# Altium PCB PortSwitcher1D.PCBDOC (part 1 of 4)
Units mil, origin at the board's own origin, x right, y up, seen from the top; angles counter-clockwise.
Board outline 6005.03 x 6005.03 mil, 4 copper layers (Top Layer, InternalPlane1, InternalPlane2, Bottom Layer); 153 components, 325 nets, 1175 pads, 173 vias.
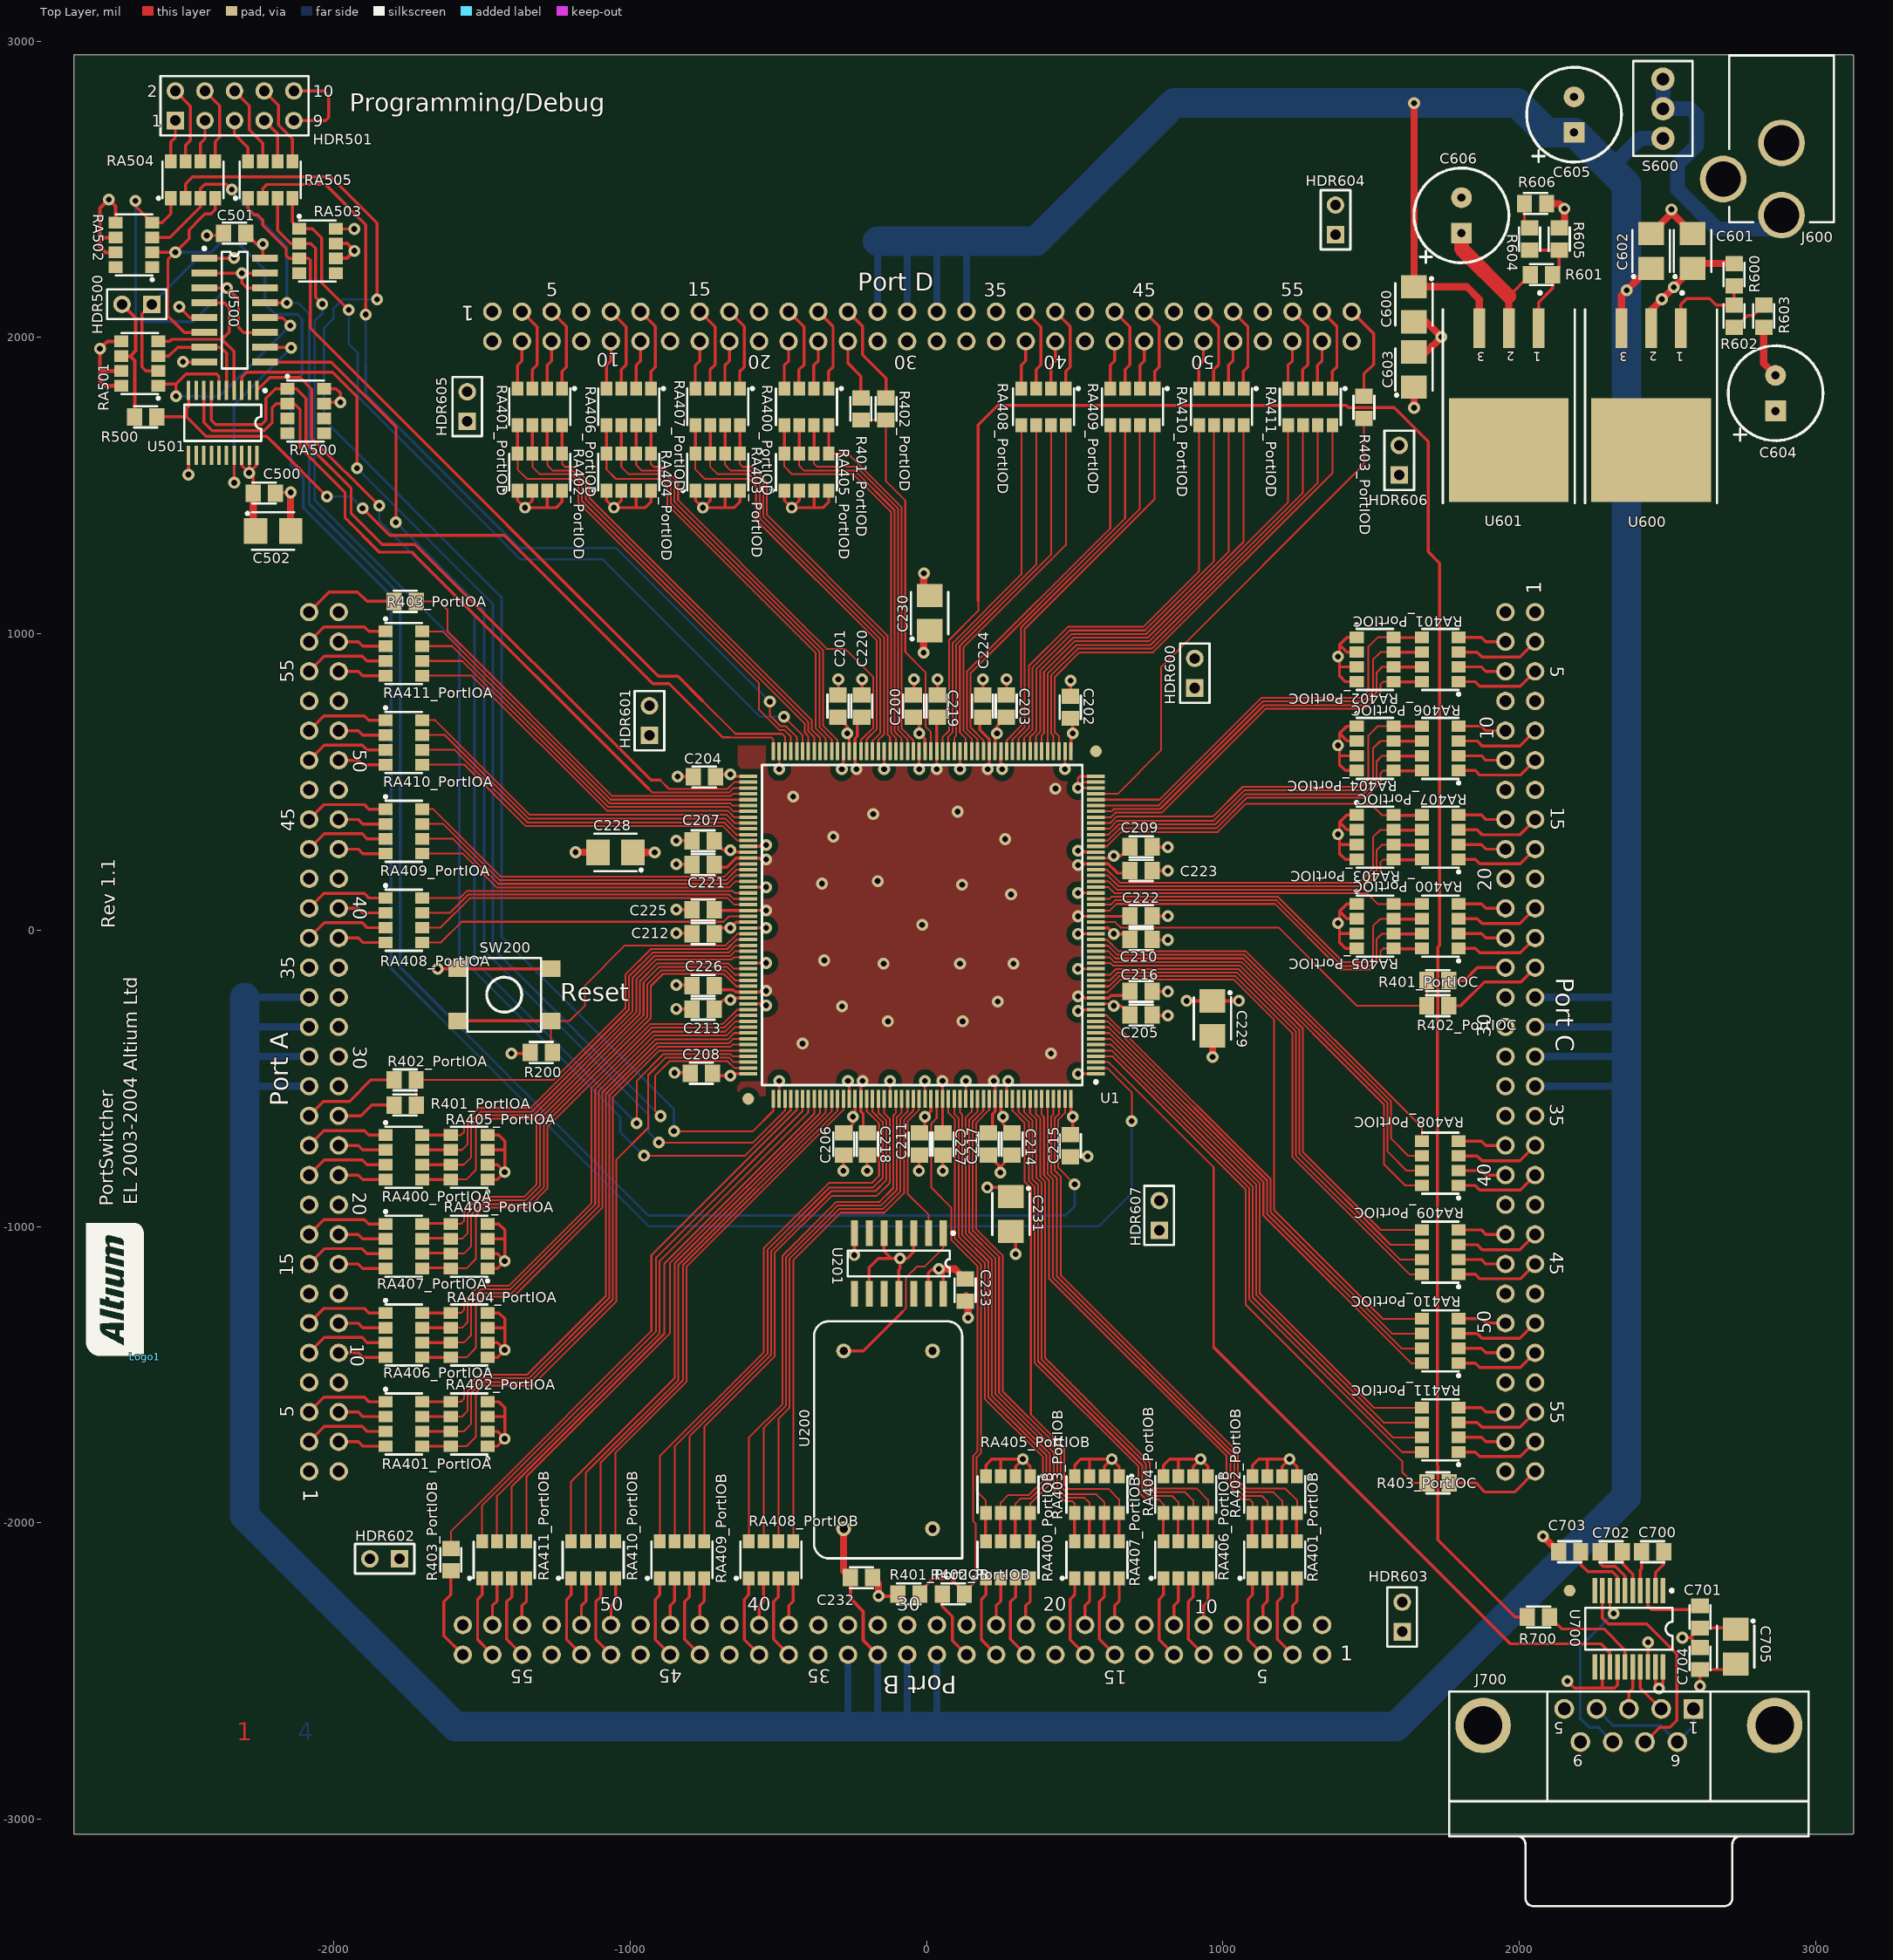
[diagram p0: Top Layer view]
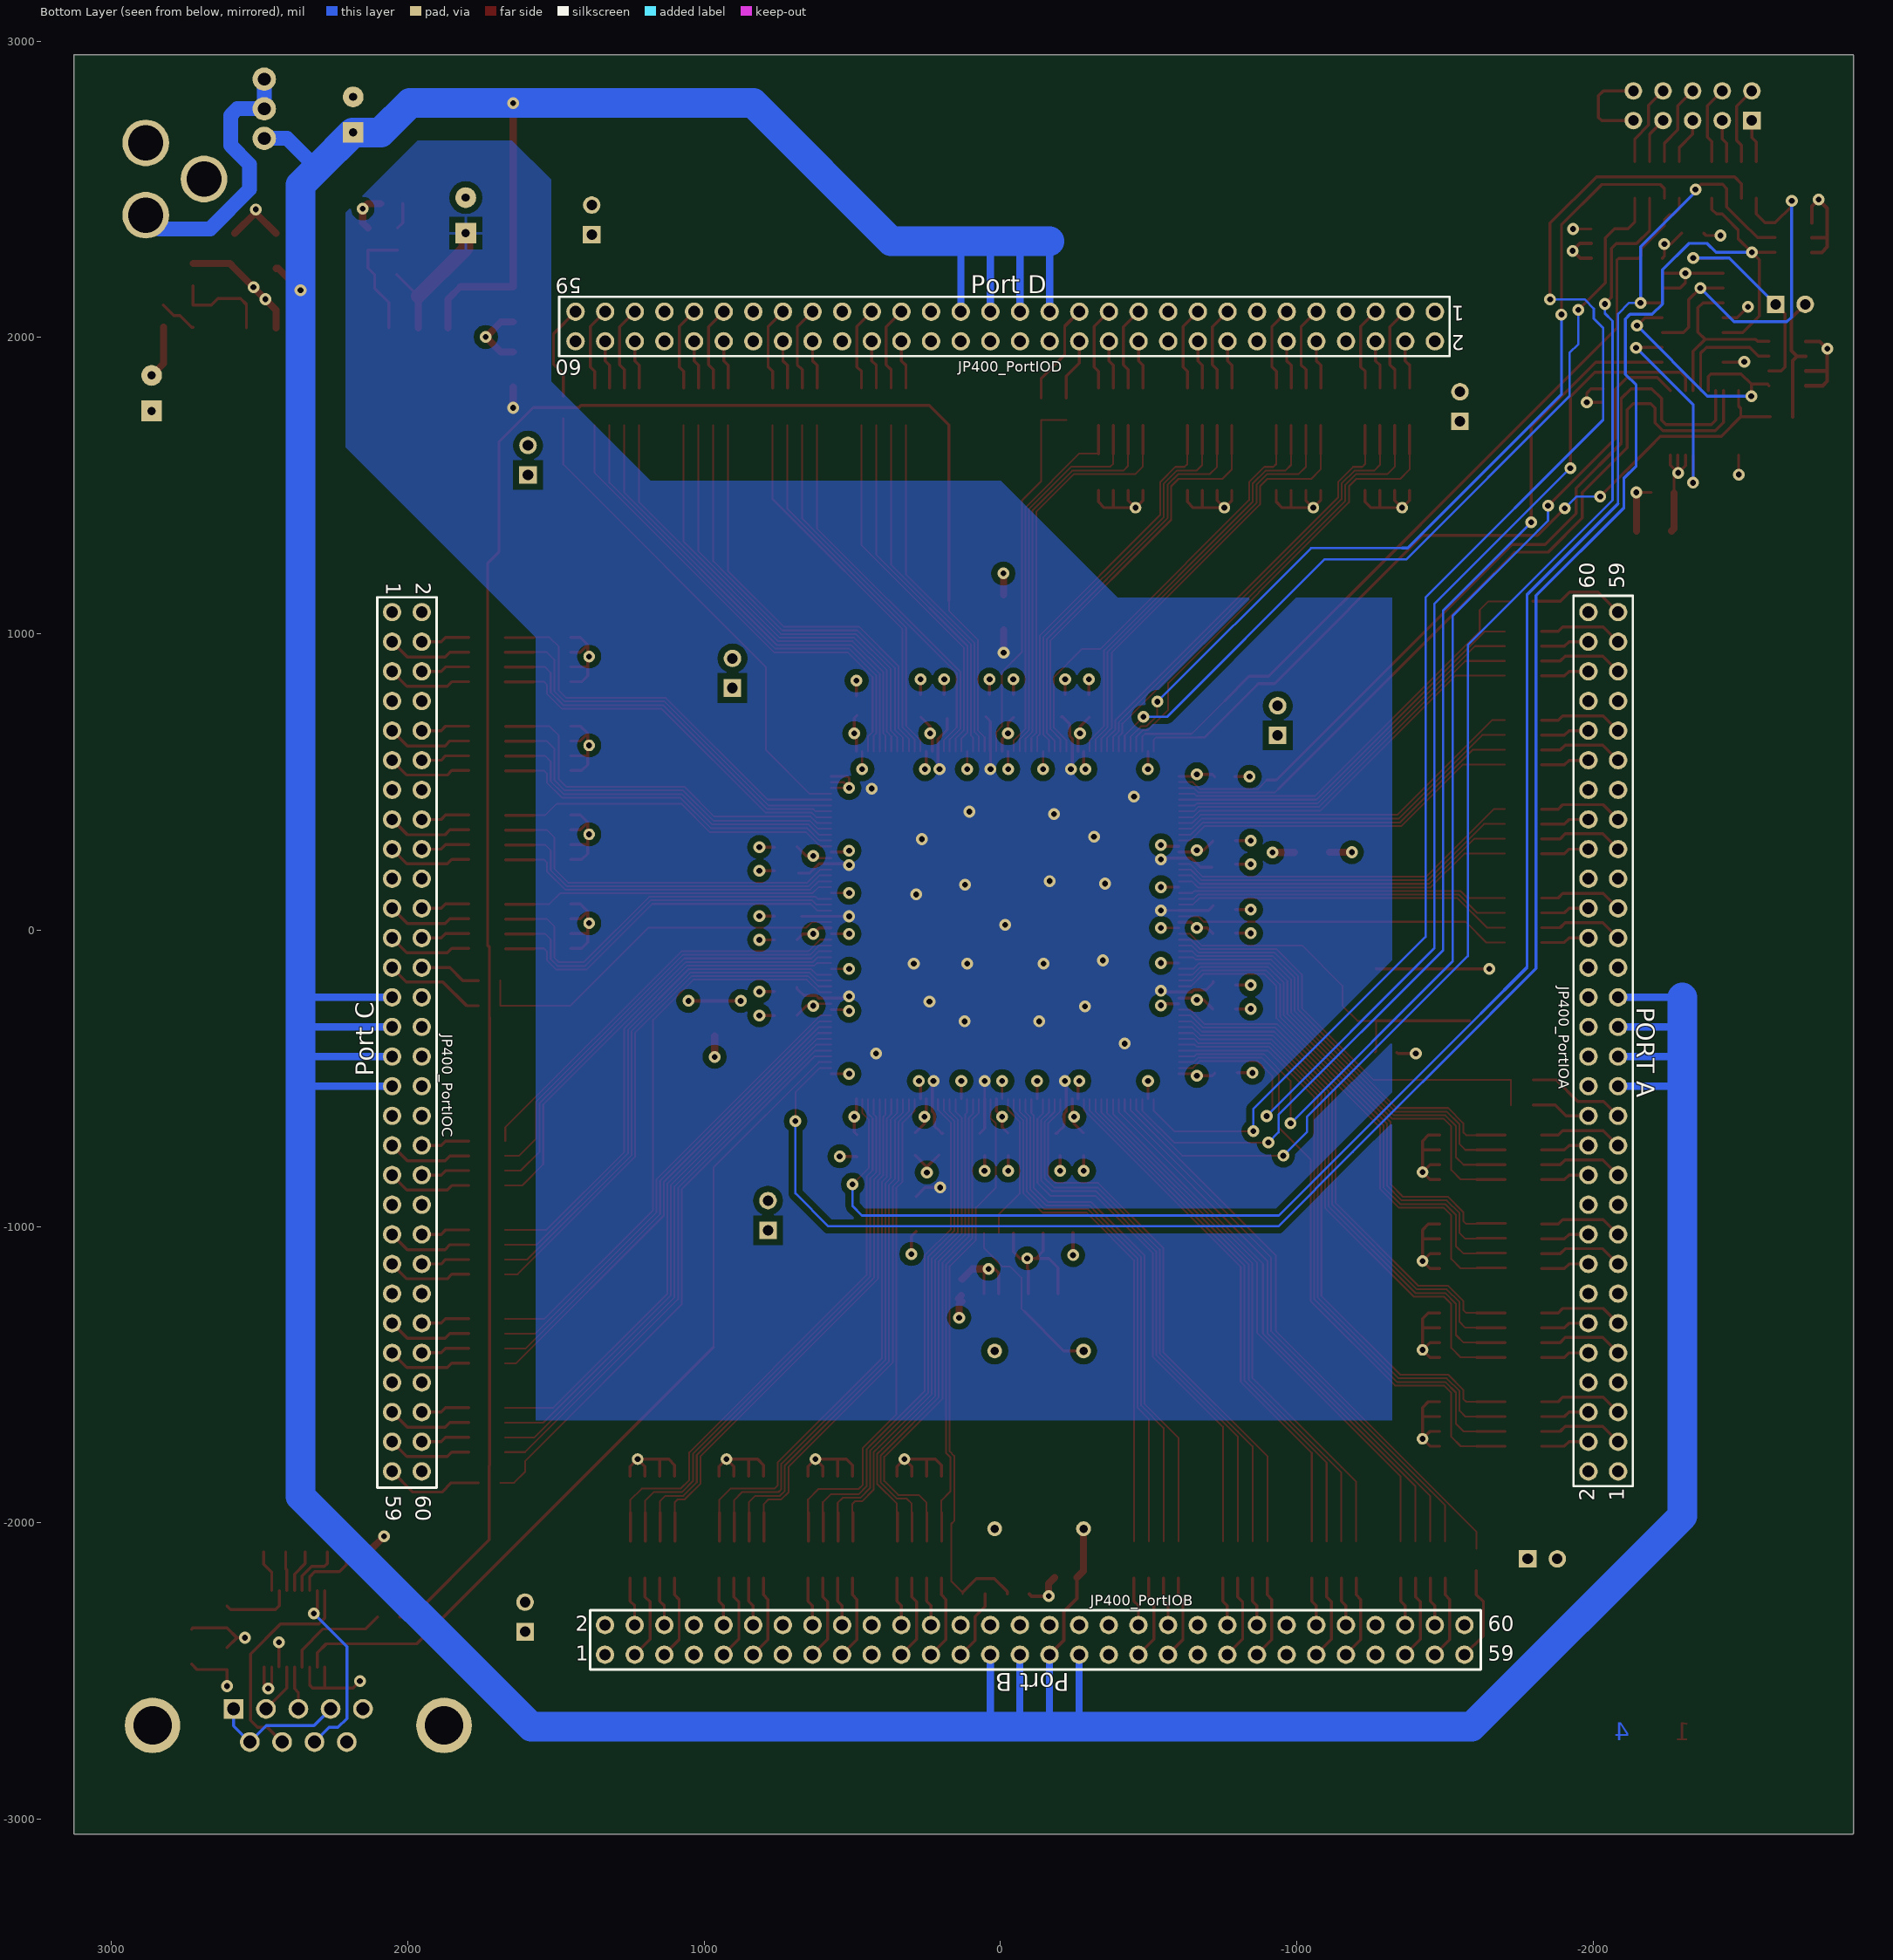
[diagram p1: Bottom Layer view, seen from below]
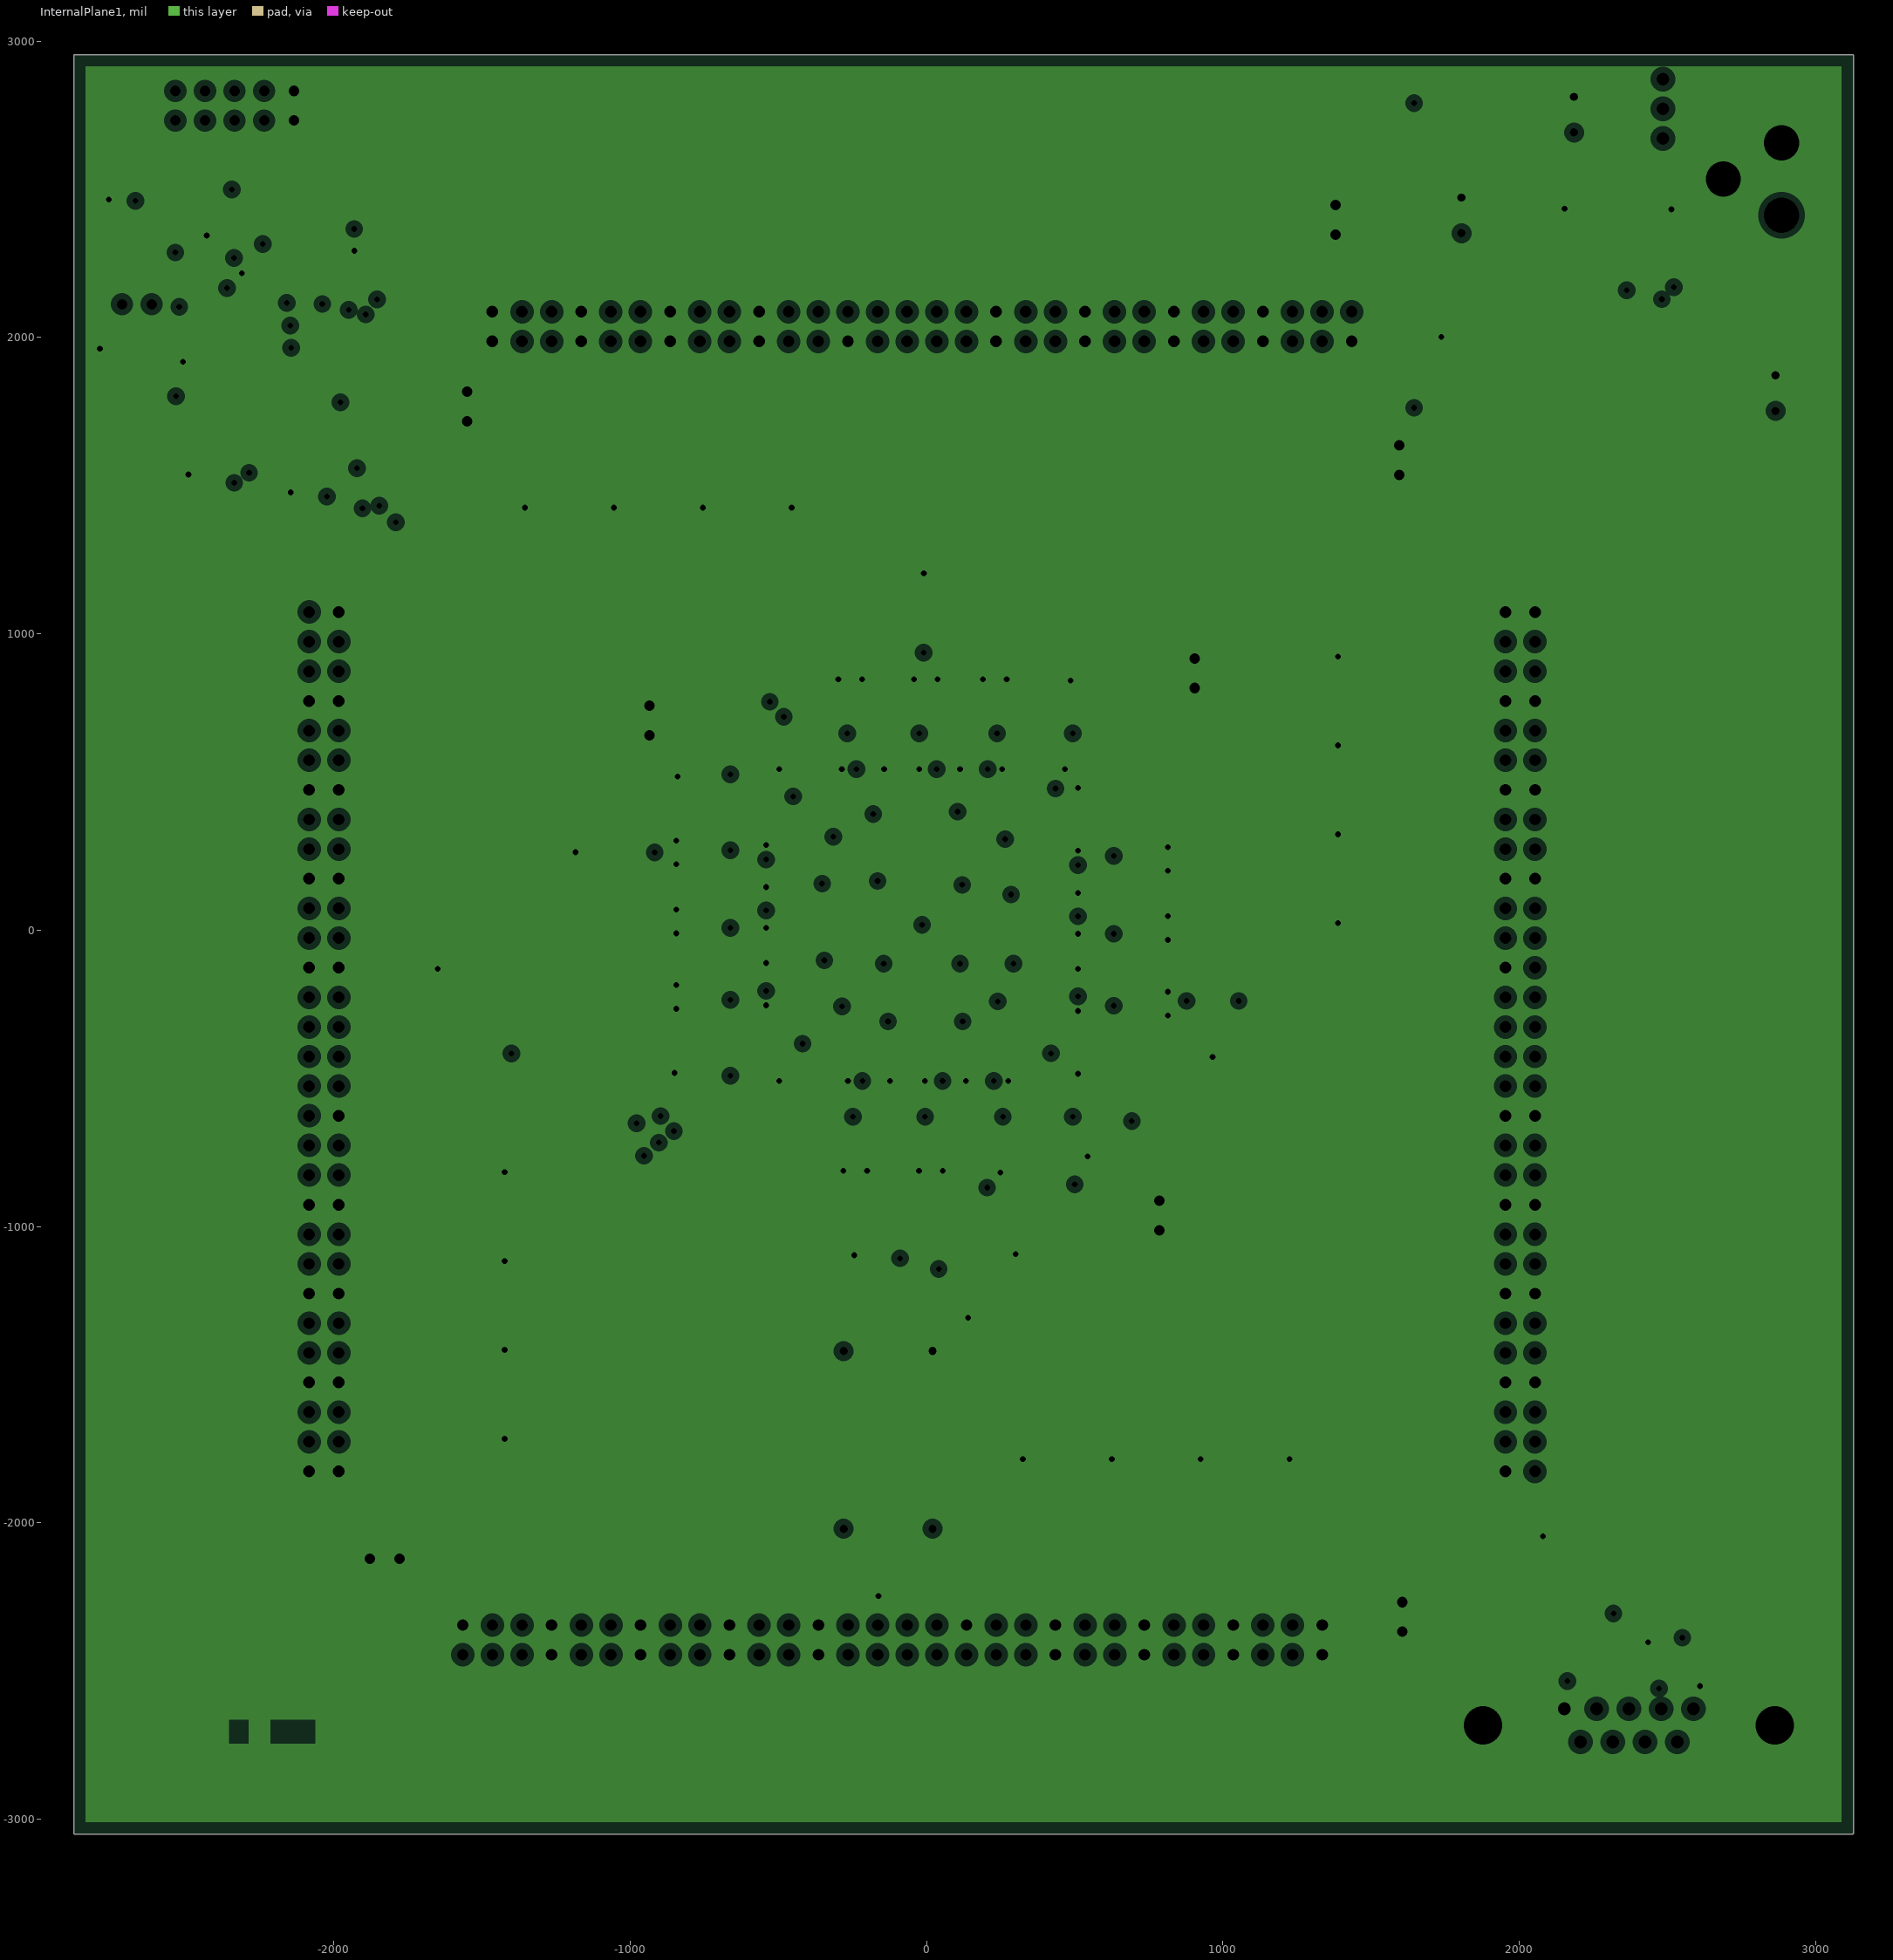
[diagram p2: InternalPlane1, clearances drawn from the general rule]
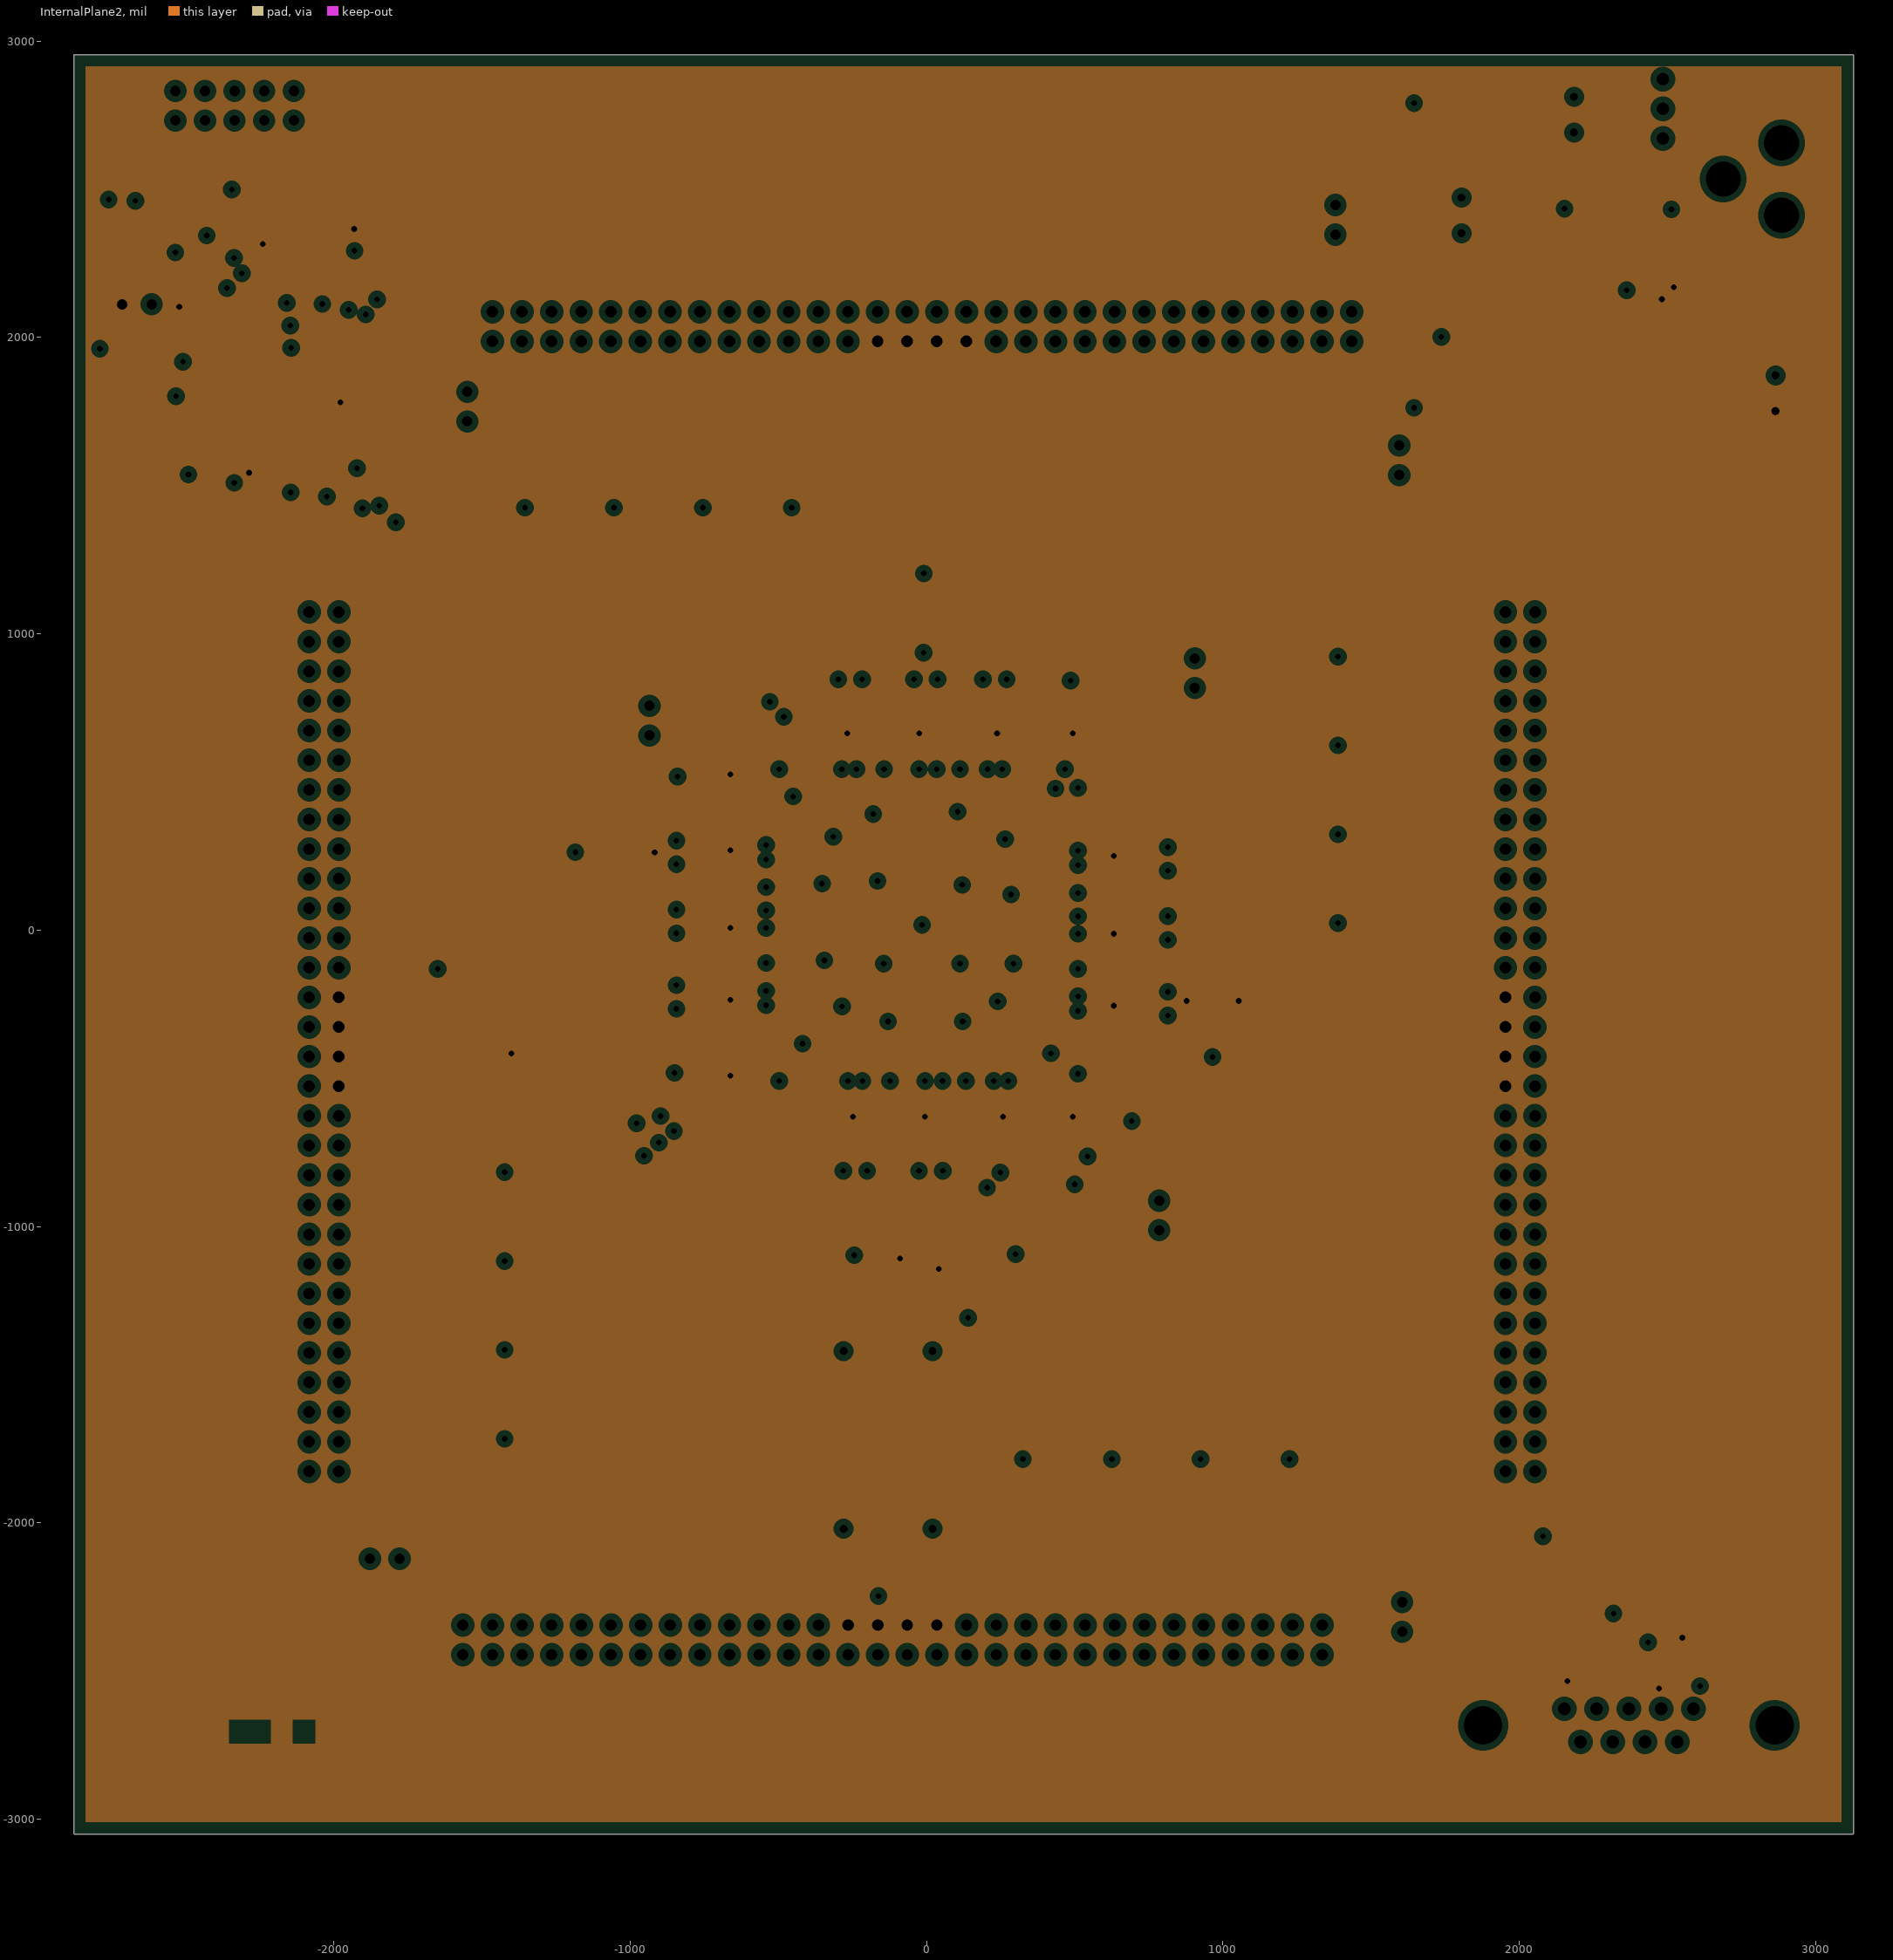
[diagram p3: InternalPlane2, clearances drawn from the general rule]

## Layer stack, top to bottom
Top Layer: signal copper 1.4
Dielectric: core 12.6, FR-4, Dk 4.8
InternalPlane1: plane copper 1.4, net GND
Dielectric: prepreg 12.6, FR-4, Dk 4.8
InternalPlane2: plane copper 1.4, net VCCO
Dielectric: core 12.6, FR-4, Dk 4.8
Bottom Layer: signal copper 1.4

## Board outline
-2875.26,-3050.22 cw(c-2875.26,-3047.71) -2877.78,-3047.71 -2877.78,2952.29 cw(c-2875.26,2952.29) -2875.26,2954.81 3124.74,2954.81 cw(c3124.74,2952.29) 3127.25,2952.29 3127.25,-3047.71 cw(c3124.74,-3047.71) 3124.74,-3050.22

## Design rules (kind name [scope] priority, off if disabled: settings)
Clearance Clearance_Polygon [InPolygon] p1: gap=20
Clearance Clearance_FPGA_Pins [IsPad and InComponent('U1')] p2: gap=7
Clearance [All] p3: gap=6
ComponentClearance [All] p1: gap=0 collisioncheckmode=3 verticalgap=10 showdistances=FALSE
FabricationTestPointUsage TestPointUsage [All] p1: valid=0 allowmultiple=FALSE
FabricationTestpoint Testpoint [All] p1: side=3 testpointundercomponent=TRUE minsize=40 maxsize=100 preferedsize=60 minholesize=0 maxholesize=40 preferedholesize=32 testpointgrid=1 allowsidetop=TRUE allowsidebottom=TRUE usegrid=TRUE gridtolerance=0.01
FanoutControl Fanout_LCC [IsLCC] p2: bgadir=Out bgaviamode=Centered fanoutstyle=Auto fanoutdirection=InOnly viagrid=1 // Fanout_LCC (Default Rule)
FanoutControl Fanout_SOIC [IsSOIC] p3: bgadir=Out bgaviamode=Centered fanoutstyle=Auto fanoutdirection=OutOnly viagrid=1 // Fanout_SOIC (Default Rule)
FanoutControl Fanout_Small [(CompPinCount < 5)] p4: bgadir=Out bgaviamode=Centered fanoutstyle=Auto fanoutdirection=OutOnly viagrid=1 // Fanout_Small (Default Rule)
FanoutControl Fanout_Default [All] p5: bgadir=Out bgaviamode=Centered fanoutstyle=Auto fanoutdirection=OutThenIn viagrid=1 // Fanout_Default (Default Rule)
HoleSize HoleSize_J600 [Ispad and InComponent('J600')] p1: absolutevalues=TRUE maxlimit=122.05 minlimit=114.17 maxpercent=80.000 minpercent=20.000
HoleSize HoleSize_J700_mounting [Ispad and InComponent('J700') and (Name like 'J700-1?')] p2: absolutevalues=TRUE maxlimit=129.92 minlimit=129.92 maxpercent=80.000 minpercent=20.000
HoleSize [All] p3: absolutevalues=TRUE maxlimit=100 minlimit=1 maxpercent=80.000 minpercent=20.000
PlaneClearance [All] p1: clearance=20
PlaneConnect [All] p1: planeconnectstyle=Relief reliefexpansion=20 reliefentries=4 reliefconductorwidth=10 reliefairgap=10
PolygonConnect [All] p1: connectstyle=Relief reliefconductorwidth=10 reliefentries=4 polygonreliefangle="90 Angle"
RoomDefinition "U_FPGA Sheet1" [InComponentClass('U_FPGA Sheet1')] p1: confinementstyle=ConfineIn formatcopy=TRUE lockcomponents=FALSE outline -965,-985 975,-985 975,955 -965,955
RoomDefinition "U_FPGA Symbol1" [InComponentClass('U_FPGA Symbol1')] p2: confinementstyle=ConfineIn formatcopy=TRUE lockcomponents=FALSE outline -1791.86,-2316.03 1405,-2316.03 1405,1258.54 -1791.86,1258.54
RoomDefinition U_PCB_JTAG1D [InComponentClass('U_PCB_JTAG1D')] p3: confinementstyle=ConfineIn formatcopy=TRUE lockcomponents=FALSE outline -1940,1239.84 -1940,2920 -2775,2920 -2775,1239.84
RoomDefinition PortIOC [InComponentClass('PortIOC')] p4: confinementstyle=ConfineIn formatcopy=FALSE lockcomponents=FALSE outline 1378.5,1241.3 1378.5,-2063.7 2218.5,-2063.7 2218.5,1241.3
RoomDefinition PortIOB [InComponentClass('PortIOB')] p5: confinementstyle=ConfineIn formatcopy=TRUE lockcomponents=FALSE outline 1535,-1772.2 -1770,-1772.2 -1770,-2612.2 1535,-2612.2
RoomDefinition PortIOD [InComponentClass('PortIOD')] p6: confinementstyle=ConfineIn formatcopy=FALSE lockcomponents=FALSE outline -1635,1378.5 1670,1378.5 1670,2218.5 -1635,2218.5
RoomDefinition PCB_Power1D [InComponentClass('PCB_Power1D')] p7: confinementstyle=ConfineIn formatcopy=TRUE lockcomponents=FALSE outline -2850,-3055 3125.18,-3055 3125.18,2970.7 -2850,2970.7
RoomDefinition U_PCB_RS2321D [InComponentClass('U_PCB_RS2321D')] p8: confinementstyle=ConfineIn formatcopy=TRUE lockcomponents=FALSE outline 1660,-3340 3145,-3340 3145,-2000 1660,-2000
RoomDefinition PortIOA [InComponentClass('PortIOA')] p9: confinementstyle=ConfineIn formatcopy=FALSE lockcomponents=FALSE outline -1378.5,-2028.7 -1378.5,1276.3 -2218.5,1276.3 -2218.5,-2028.7
RoutingPriority RoutingPriority_Supply [innet('VCCO') or innet('VCCINT') or innet('5V') or innet('GND')] p1: routingpriority=80
RoutingPriority [All] p2: routingpriority=0
RoutingVias [All] p1: holewidth=19.68 width=40 viastyle="Through Hole" minholewidth=19.68 minwidth=40 maxholewidth=31.5 maxwidth=70
SMDNeckDown [All] p1: percent=60.000
SilkscreenOverComponentPads [All] p1: minsilkscreentomaskgap=10
SolderMaskExpansion [All] p1: expansion=4
Width Width_Power [innet('VCCO') or innet('VCCINT') or innet('5V')] p1: maxlimit=100 minlimit=6 preferedwidth=10
Width [All] p2: maxlimit=50 minlimit=6 preferedwidth=6
16 further rules are at their usual default settings.

## Classes and differential pairs
channel class PCB_PortIO1D: PortIOA PortIOB PortIOC PortIOD
component class PortIOD: JP400_PortIOD R401_PortIOD R402_PortIOD R403_PortIOD RA400_PortIOD RA401_PortIOD RA402_PortIOD RA403_PortIOD RA404_PortIOD RA405_PortIOD RA406_PortIOD RA407_PortIOD RA408_PortIOD RA409_PortIOD RA410_PortIOD RA411_PortIOD
component class PortIOC: JP400_PortIOC R401_PortIOC R402_PortIOC R403_PortIOC RA400_PortIOC RA401_PortIOC RA402_PortIOC RA403_PortIOC RA404_PortIOC RA405_PortIOC RA406_PortIOC RA407_PortIOC RA408_PortIOC RA409_PortIOC RA410_PortIOC RA411_PortIOC
component class PortIOB: JP400_PortIOB R401_PortIOB R402_PortIOB R403_PortIOB RA400_PortIOB RA401_PortIOB RA402_PortIOB RA403_PortIOB RA404_PortIOB RA405_PortIOB RA406_PortIOB RA407_PortIOB RA408_PortIOB RA409_PortIOB RA410_PortIOB RA411_PortIOB
component class PortIOA: JP400_PortIOA R401_PortIOA R402_PortIOA R403_PortIOA RA400_PortIOA RA401_PortIOA RA402_PortIOA RA403_PortIOA RA404_PortIOA RA405_PortIOA RA406_PortIOA RA407_PortIOA RA408_PortIOA RA409_PortIOA RA410_PortIOA RA411_PortIOA
component class PCB_Power1D: C600 C601 C602 C603 C604 C605 C606 HDR600 HDR601 HDR602 HDR603 HDR604 HDR605 HDR606 HDR607 J600 R600 R601 R602 R603 R604 R605 R606 S600 U600 U601
component class "U_FPGA Symbol1": C200 C201 C202 C203 C204 C205 C206 C207 C208 C209 C210 C211 C212 C213 C214 C215 C216 C217 C218 C219 C220 C221 C222 C223 C224 C225 C226 C227 C228 C229 C230 C231 C232 C233 R200 SW200 U200 U201
component class "U_FPGA Sheet1": U1
net class INA[16..0]: INA0 INA1 INA2 INA3 INA4 INA5 INA6 INA7 INA8 INA9 INA10 INA11 INA12 INA13 INA14 INA15 INA16
net class INB[16..0]: INB0 INB1 INB2 INB3 INB4 INB5 INB6 INB7 INB8 INB9 INB10 INB11 INB12 INB13 INB14 INB15 INB16
net class INC[16..0]: INC0 INC1 INC2 INC3 INC4 INC5 INC6 INC7 INC8 INC9 INC10 INC11 INC12 INC13 INC14 INC15 INC16
net class IND[16..0]: IND0 IND1 IND2 IND3 IND4 IND5 IND6 IND7 IND8 IND9 IND10 IND11 IND12 IND13 IND14 IND15 IND16
net class OUTA[16..0]: OUTA0 OUTA1 OUTA2 OUTA3 OUTA4 OUTA5 OUTA6 OUTA7 OUTA8 OUTA9 OUTA10 OUTA11 OUTA12 OUTA13 OUTA14 OUTA15 OUTA16
net class OUTB[16..0]: OUTB0 OUTB1 OUTB2 OUTB3 OUTB4 OUTB5 OUTB6 OUTB7 OUTB8 OUTB9 OUTB10 OUTB11 OUTB12 OUTB13 OUTB14 OUTB15 OUTB16
net class OUTC[16..0]: OUTC0 OUTC1 OUTC2 OUTC3 OUTC4 OUTC5 OUTC6 OUTC7 OUTC8 OUTC9 OUTC10 OUTC11 OUTC12 OUTC13 OUTC14 OUTC15 OUTC16
net class OUTD[16..0]: OUTD0 OUTD1 OUTD2 OUTD3 OUTD4 OUTD5 OUTD6 OUTD7 OUTD8 OUTD9 OUTD10 OUTD11 OUTD12 OUTD13 OUTD14 OUTD15 OUTD16
component class U_PCB_JTAG1D: C500 C501 C502 HDR500 HDR501 R500 RA500 RA501 RA502 RA503 RA504 RA505 U500 U501
component class U_PCB_RS2321D: C700 C701 C702 C703 C704 C705 J700 R700 U700

## Components (designator, comment, footprint, x,y, rotation, side; value= is the part's Value field where it differs from the comment)
C200 "100n" CC2012-0805 -44.26,756.29 r90 top
C201 "100n" CC2012-0805 -299.26,756.29 r90 top
C202 "100n" CC2012-0805 484.74,752.29 r90 top
C203 "100n" CC2012-0805 268.74,756.29 r90 top
C204 "100n" CC2012-0805 -750.26,517.29 r180 top
C205 "100n" CC2012-0805 723.74,-286.39 r0 top
C206 "100n" CC2012-0805 -279.58,-721.71 r270 top
C207 "100n" CC2012-0805 -754.26,301.29 r180 top
C208 "100n" CC2012-0805 -760.26,-482.71 r0 top
C209 "100n" CC2012-0805 723.74,281.61 r180 top
C210 "100n" CC2012-0805 723.74,-31.39 r180 top
C211 "100n" CC2012-0805 -24.58,-721.71 r90 top
C212 "100n" CC2012-0805 -754.26,-11.71 r0 top
C213 "100n" CC2012-0805 -754.26,-266.71 r0 top
C214 "100n" CC2012-0805 288.42,-721.71 r90 top
C215 "100n" CC2012-0805 484.74,-727.71 r90 top
C216 "100n" CC2012-0805 723.74,-206.39 r0 top
C217 "100n" CC2012-0805 208.42,-721.71 r270 top
C218 "100n" CC2012-0805 -199.58,-721.71 r270 top
C219 "100n" CC2012-0805 35.74,756.29 r90 top
C220 "100n" CC2012-0805 -219.26,756.29 r90 top
C221 "100n" CC2012-0805 -754.26,221.29 r180 top
C222 "100n" CC2012-0805 723.74,48.61 r180 top
C223 "100n" CC2012-0805 723.74,201.61 r180 top
C224 "100n" CC2012-0805 188.74,756.29 r270 top
C225 "100n" CC2012-0805 -754.26,68.29 r0 top
C226 "100n" CC2012-0805 -754.26,-186.71 r0 top
C227 "100n" CC2012-0805 55.42,-721.71 r90 top
C228 "10uF" MCCT-B -1050.26,262.29 r180 top
C229 "10uF" MCCT-B 964.74,-297.71 r270 top
C230 "10uF" MCCT-B 10,1070 r90 top
C231 "10uF" MCCT-B 284.74,-957.71 r270 top
C232 "100n" CC2012-0805 -220,-2185 r0 top
C233 "100n" CC2012-0805 130,-1215 r270 top
C500 "100n" CC2012-0805 -2235.26,1475.08 r0 top
C501 "100n" CC2012-0805 -2335.26,2352.29 r180 top
C502 "10uF" MCCT-B -2205.26,1347.29 r0 top
C600 "10uF" MCCT-B 1644.74,2112.29 r270 top
C601 "10uF" MCCT-B 2584.74,2292.29 r90 top
C602 "10uF" MCCT-B 2444.74,2292.29 r90 top
C603 "10uF" MCCT-B 1644.74,1892.29 r90 top
C604 "470uF 16V" RB8/3.5 2864.74,1812.29 r180 top
C605 "470uF 16V" RB8/3.5 2184.74,2752.29 r180 top
C606 "470uF 16V" RB8/3.5 1804.74,2412.29 r180 top
C700 "100n" CC2012-0805 2449.74,-2097.71 r180 top
C701 "100n" CC2012-0805 2609.74,-2317.71 r90 top
C702 "100n" CC2012-0805 2309.74,-2097.71 r180 top
C703 "100n" CC2012-0805 2169.74,-2097.71 r180 top
C704 "100n" CC2012-0805 2609.74,-2457.71 r270 top
C705 "10uF" MCCT-B 2729.74,-2417.71 r270 top
HDR500 "Header 2" HDR1X2 -2615.26,2112.29 r180 top
HDR501 "Header 5X2" HDR2X5 -2535.26,2732.29 r0 top
HDR600 "Header 2" HDR1X2 904.74,817.29 r90 top
HDR601 "Header 2" HDR1X2 -935.26,657.29 r90 top
HDR602 "Header 2" HDR1X2 -1778.77,-2121.41 r180 top
HDR603 "Header 2" HDR1X2 1604.74,-2367.71 r90 top
HDR604 "Header 2" HDR1X2 1379.74,2347.29 r90 top
HDR605 "Header 2" HDR1X2 -1550.26,1717.09 r90 top
HDR606 "Header 2" HDR1X2 1594.74,1535.99 r90 top
HDR607 "Header 2" HDR1X2 784.74,-1012.71 r90 top
J600 "PWR2.5" PWR2.5 2884.74,2952.29 r270 top
J700 "DB9 Female" DSUB1.385-2H9 2369.74,-3057.71 r180 top
JP400_PortIOA "Header 30X2" HDR2X30 -2083.77,-1826.41 r90 bottom (schematic designator JP400)
JP400_PortIOB "Header 30X2" HDR2X30 1334.74,-2444.91 r180 bottom (schematic designator JP400)
JP400_PortIOC "Header 30X2" HDR2X30 2053.24,1073.59 r270 bottom (schematic designator JP400)
JP400_PortIOD "Header 30X2" HDR2X30 -1465.66,2087.37 r0 bottom (schematic designator JP400)
Logo1 "Comment" AltiumLogo48mm -2638.02,-1440.66 r90 top
R200 "4K7" CC2012-0805 -1300.26,-412.71 r180 top
R401_PortIOA "100k" CC2012-0805 -1760,-590 r0 top (schematic designator R401)
R401_PortIOB "100k" CC2012-0805 -60,-2240 r0 top (schematic designator R401)
R401_PortIOC "100k" CC2012-0805 1725,-170 r180 top (schematic designator R401)
R401_PortIOD "100k" CC2012-0805 -222.07,1759.13 r270 top (schematic designator R401)
R402_PortIOA "100R" CC2012-0805 -1760,-505 r180 top (schematic designator R402)
R402_PortIOB "100R" CC2012-0805 90,-2240 r180 top (schematic designator R402)
R402_PortIOC "100R" CC2012-0805 1725,-255 r0 top (schematic designator R402)
R402_PortIOD "100R" CC2012-0805 -137.07,1759.13 r90 top (schematic designator R402)
R403_PortIOA "100R" CC2012-0805 -1759.55,1109.68 r180 top (schematic designator R403)
R403_PortIOB "100R" CC2012-0805 -1605.5,-2124.5 r270 top (schematic designator R403)
R403_PortIOC "100R" CC2012-0805 1725.43,-1865 r0 top (schematic designator R403)
R403_PortIOD "100R" CC2012-0805 1475.5,1764.5 r90 top (schematic designator R403)
R500 "330R" CC2012-0805 -2635.26,1732.29 r0 top
R600 "120R" CC2012-0805 2724.74,2212.29 r90 top
R601 "120R" CC2012-0805 2074.74,2212.29 r180 top
R602 "100R" CC2012-0805 2724.74,2072.29 r90 top
R603 "100R" CC2012-0805 2824.74,2072.29 r90 top
R604 "47R" CC2012-0805 2034.74,2332.29 r270 top
R605 "nf(47R)" CC2012-0805 2134.74,2332.29 r270 top
R606 "5R6" CC2012-0805 2054.74,2452.29 r180 top
R700 "100R" CC2012-0805 2064.74,-2317.71 r180 top
RA400_PortIOA "100R" MNR34 -1763.77,-766.41 r0 top (schematic designator RA400)
RA400_PortIOB "100R" MNR34 274.74,-2124.91 r90 top (schematic designator RA400)
RA400_PortIOC "100R" MNR34 1733.24,13.59 r180 top (schematic designator RA400)
RA400_PortIOD "100R" MNR34 -405.26,1765.8 r270 top (schematic designator RA400)
RA401_PortIOA "100R" MNR34 -1763.77,-1666.41 r0 top (schematic designator RA401)
RA401_PortIOB "100R" MNR34 1174.74,-2124.91 r90 top (schematic designator RA401)
RA401_PortIOC "100R" MNR34 1733.24,913.59 r180 top (schematic designator RA401)
RA401_PortIOD "100R" MNR34 -1305.26,1765.8 r270 top (schematic designator RA401)
RA402_PortIOA "100k" MNR34 -1543.77,-1666.41 r180 top (schematic designator RA402)
RA402_PortIOB "100k" MNR34 1174.74,-1904.91 r270 top (schematic designator RA402)
RA402_PortIOC "100k" MNR34 1513.24,913.59 r0 top (schematic designator RA402)
RA402_PortIOD "100k" MNR34 -1305.26,1545.8 r90 top (schematic designator RA402)
RA403_PortIOA "100k" MNR34 -1543.77,-1066.41 r180 top (schematic designator RA403)
RA403_PortIOB "100k" MNR34 574.74,-1904.91 r270 top (schematic designator RA403)
RA403_PortIOC "100k" MNR34 1513.24,313.59 r0 top (schematic designator RA403)
RA403_PortIOD "100k" MNR34 -705.26,1545.8 r90 top (schematic designator RA403)
RA404_PortIOA "100k" MNR34 -1543.77,-1366.41 r180 top (schematic designator RA404)
RA404_PortIOB "100k" MNR34 874.74,-1904.91 r270 top (schematic designator RA404)
RA404_PortIOC "100k" MNR34 1513.24,613.59 r0 top (schematic designator RA404)
RA404_PortIOD "100k" MNR34 -1005.26,1545.8 r90 top (schematic designator RA404)
RA405_PortIOA "100k" MNR34 -1543.77,-766.41 r180 top (schematic designator RA405)
RA405_PortIOB "100k" MNR34 274.74,-1904.91 r270 top (schematic designator RA405)
RA405_PortIOC "100k" MNR34 1513.24,13.59 r0 top (schematic designator RA405)
RA405_PortIOD "100k" MNR34 -405.26,1545.8 r90 top (schematic designator RA405)
RA406_PortIOA "100R" MNR34 -1763.77,-1366.41 r0 top (schematic designator RA406)
RA406_PortIOB "100R" MNR34 874.74,-2124.91 r90 top (schematic designator RA406)
RA406_PortIOC "100R" MNR34 1733.24,613.59 r180 top (schematic designator RA406)
RA406_PortIOD "100R" MNR34 -1005.26,1765.8 r270 top (schematic designator RA406)
RA407_PortIOA "100R" MNR34 -1763.77,-1066.41 r0 top (schematic designator RA407)
RA407_PortIOB "100R" MNR34 574.74,-2124.91 r90 top (schematic designator RA407)
RA407_PortIOC "100R" MNR34 1733.24,313.59 r180 top (schematic designator RA407)
RA407_PortIOD "100R" MNR34 -705.26,1765.8 r270 top (schematic designator RA407)
RA408_PortIOA "100R" MNR34 -1763.77,33.59 r0 top (schematic designator RA408)
RA408_PortIOB "100R" MNR34 -525.26,-2124.91 r90 top (schematic designator RA408)
RA408_PortIOC "100R" MNR34 1733.24,-786.41 r180 top (schematic designator RA408)
RA408_PortIOD "100R" MNR34 394.74,1765.8 r270 top (schematic designator RA408)
RA409_PortIOA "100R" MNR34 -1763.77,333.59 r0 top (schematic designator RA409)
RA409_PortIOB "100R" MNR34 -825.26,-2124.91 r90 top (schematic designator RA409)
RA409_PortIOC "100R" MNR34 1733.24,-1086.41 r180 top (schematic designator RA409)
RA409_PortIOD "100R" MNR34 694.74,1765.8 r270 top (schematic designator RA409)
RA410_PortIOA "100R" MNR34 -1763.77,633.59 r0 top (schematic designator RA410)
RA410_PortIOB "100R" MNR34 -1125.26,-2124.91 r90 top (schematic designator RA410)
RA410_PortIOC "100R" MNR34 1733.24,-1386.41 r180 top (schematic designator RA410)
RA410_PortIOD "100R" MNR34 994.74,1765.8 r270 top (schematic designator RA410)
RA411_PortIOA "100R" MNR34 -1763.77,933.59 r0 top (schematic designator RA411)
RA411_PortIOB "100R" MNR34 -1425.26,-2124.91 r90 top (schematic designator RA411)
RA411_PortIOC "100R" MNR34 1733.24,-1686.41 r180 top (schematic designator RA411)
RA411_PortIOD "100R" MNR34 1294.74,1765.8 r270 top (schematic designator RA411)
RA500 "3k3" MNR34 -2095.26,1752.29 r0 top
RA501 "4k7" MNR34 -2655.26,1912.29 r180 top
RA502 "4k7" MNR34 -2675.26,2312.29 r180 top
RA503 "4k7" MNR34 -2055.26,2292.29 r0 top
RA504 "100R" MNR34 -2475.26,2532.29 r90 top
RA505 "100R" MNR34 -2215.26,2532.29 r90 top
S600 "SPST" PCB_SWITCH 2484.74,2672.29 r180 top
SW200 "B3FS" B3FS_SWITCH -1425.26,-217.71 r0 top
U1 "XC2S300E-6PQ208C" PQ208 -15.26,17.29 r180 top
U200 "32MHz" XO600CP 20,-2020 r90 top
U201 "MC74LVX04D" 751A-03 -94,-1124.44 r180 top
U500 "MC74LCX157D" 751B-05 -2335.26,2092.29 r270 top
U501 "XCF04SVO20C" VO20 -2375.26,1712.29 r180 top
U600 "LM1084IS-ADJ" TO-263 2544.74,2032.29 r180 top
U601 "LM1084IS-ADJ" TO-263 2064.74,2032.29 r180 top
U700 "ICL3225ECA" SSO-G20/P.65 2369.74,-2357.71 r180 top

## Footprints (in the part's own frame and the unit in brackets; to place one, negate y for a bottom-side part, rotate by r counter-clockwise, add the part's x,y. Pads: shape width x height; smd on the part's side, far side on the other; paste and mask are expansions set on the pad)
751A-03 [mm] "Small Outline; 14 Leads; Body Width 3.9 mm; Pitch 1.27 mm"
  rect 0.6x2.2 smd: 1(-3.81,-2.6) 2(-2.54,-2.6) 3(-1.27,-2.6) 4(0,-2.6) 5(1.27,-2.6) 6(2.54,-2.6) 7(3.81,-2.6) 8(3.81,2.6) 9(2.54,2.6) 10(1.27,2.6) 11(0,2.6) 12(-1.27,2.6) 13(-2.54,2.6) 14(-3.81,2.6)
  silkscreen extent -4.78,-2.72 4.38,1.1
751B-05 [mm] "Small Outline; 16 Leads; Body Width 3.9 mm; Pitch 1.27 mm"
  rect 0.6x2.2 smd: 1(-4.445,-2.6) 2(-3.175,-2.6) 3(-1.905,-2.6) 4(-0.635,-2.6) 5(0.635,-2.6) 6(1.905,-2.6) 7(3.175,-2.6) 8(4.445,-2.6) 9(4.445,2.6) 10(3.175,2.6) 11(1.905,2.6) 12(0.635,2.6) 13(-0.635,2.6) 14(-1.905,2.6) 15(-3.175,2.6) 16(-4.445,2.6)
  silkscreen extent -5.42,-2.72 5,1.1
AltiumLogo48mm [mil]
  silkscreen extent 4,4 452,196
B3FS_SWITCH [mm]
  rect 1.6x1.4 smd: 1(4.01,-2.25) 2(-4,-2.25) 3(4.01,2.24) 4(-4,2.24)
  silkscreen extent -3.16,-3.16 3.15,3.15
CC2012-0805 [mm]
  rect 1.3x1.5 smd: 1(-0.95,0) 2(0.95,0)
  silkscreen extent -1,-0.9 1,0.9
DSUB1.385-2H9 [mm]
  rect 1.69x1.69 hole 1.1: 1(-5.54,-10.92)
  round 1.69 hole 1.1: 2(-2.77,-10.92) 3(0,-10.92) 4(2.77,-10.92) 5(5.54,-10.92) 6(-4.155,-8.08) 7(-1.385,-8.08) 8(1.385,-8.08) 9(4.155,-8.08)
  round 4.76 hole 3.3: 10(-12.495,-9.5) 11(12.495,-9.5)
  silkscreen extent -15.4,-12.4 15.4,6
HDR1X2 [mm]
  rect 1.5x1.5 hole 0.9: 1(0,0)
  round 1.5 hole 0.9: 2(2.54,0)
  silkscreen extent -1.27,-1.27 3.81,1.27
HDR2X5 [mm]
  rect 1.5x1.5 hole 0.9: 1(0,0)
  round 1.5 hole 0.9: 2(0,2.54) 3(2.54,0) 4(2.54,2.54) 5(5.08,0) 6(5.08,2.54) 7(7.62,0) 8(7.62,2.54) 9(10.16,0) 10(10.16,2.54)
  silkscreen extent -1.27,-1.27 11.43,3.81
HDR2X30 [mil]
  round 62 hole 39.37: 1(0,0) 2(0,100) 3(100,0) 4(100,100) 5(200,0) 6(200,100) 7(300,0) 8(300,100) 9(400,0) 10(400,100) 11(500,0) 12(500,100) 13(600,0) 14(600,100) 15(700,0) 16(700,100) 17(800,0) 18(800,100) 19(900,0) 20(900,100) 21(1000,0) 22(1000,100) 23(1100,0) 24(1100,100) 25(1200,0) 26(1200,100) 27(1300,0) 28(1300,100) 29(1400,0) 30(1400,100) 31(1500,0) 32(1500,100) 33(1600,0) 34(1600,100) 35(1700,0) 36(1700,100) 37(1800,0) 38(1800,100) 39(1900,0) 40(1900,100) 41(2000,0) 42(2000,100) 43(2100,0) 44(2100,100) 45(2200,0) 46(2200,100) 47(2300,0) 48(2300,100) 49(2400,0) 50(2400,100) 51(2500,0) 52(2500,100) 53(2600,0) 54(2600,100) 55(2700,0) 56(2700,100) 57(2800,0) 58(2800,100) 59(2900,0) 60(2900,100)
  silkscreen extent -50,-50 2955,150
MCCT-B [mm]
  rect 2x2.2 smd: 1(-1.5,0) 2(1.5,0)
  silkscreen extent -2.3,-1.6 1.8,1.6
MNR34 [mm]
  rect 1.2x1 smd: 1(-1.575,1.905) 2(-1.575,0.635) 3(-1.575,-0.635) 4(-1.575,-1.905) 5(1.575,-1.905) 6(1.575,-0.635) 7(1.575,0.635) 8(1.575,1.905)
  silkscreen extent -1.67,-2.62 1.55,3.07
PCB_SWITCH [mm]
  round 2 hole 1.1: 1(0,-5.08) 2(0,-2.54) 3(0,0)
  silkscreen extent -2.54,-6.63 2.54,1.5
PQ208 [mm] "208-Pin Plastic Quad Flat Pack (PQ208)"
  rect 1.55x0.3 smd: 1(-14.9,12.75) 2(-14.9,12.25) 3(-14.9,11.75) 4(-14.9,11.25) 5(-14.9,10.75) 6(-14.9,10.25) 7(-14.9,9.75) 8(-14.9,9.25) 9(-14.9,8.75) 10(-14.9,8.25) 11(-14.9,7.75) 12(-14.9,7.25) 13(-14.9,6.75) 14(-14.9,6.25) 15(-14.9,5.75) 16(-14.9,5.25) 17(-14.9,4.75) 18(-14.9,4.25) 19(-14.9,3.75) 20(-14.9,3.25) 21(-14.9,2.75) 22(-14.9,2.25) 23(-14.9,1.75) 24(-14.9,1.25) 25(-14.9,0.75) 26(-14.9,0.25) 27(-14.9,-0.25) 28(-14.9,-0.75) 29(-14.9,-1.25) 30(-14.9,-1.75) 31(-14.9,-2.25) 32(-14.9,-2.75) 33(-14.9,-3.25) 34(-14.9,-3.75) 35(-14.9,-4.25) 36(-14.9,-4.75) 37(-14.9,-5.25) 38(-14.9,-5.75) 39(-14.9,-6.25) 40(-14.9,-6.75) 41(-14.9,-7.25) 42(-14.9,-7.75) 43(-14.9,-8.25) 44(-14.9,-8.75) 45(-14.9,-9.25) 46(-14.9,-9.75) 47(-14.9,-10.25) 48(-14.9,-10.75) 49(-14.9,-11.25) 50(-14.9,-11.75) 51(-14.9,-12.25) 52(-14.9,-12.75) 105(14.9,-12.75) 106(14.9,-12.25) 107(14.9,-11.75) 108(14.9,-11.25) 109(14.9,-10.75) 110(14.9,-10.25) 111(14.9,-9.75) 112(14.9,-9.25) 113(14.9,-8.75) 114(14.9,-8.25) 115(14.9,-7.75) 116(14.9,-7.25) 117(14.9,-6.75) 118(14.9,-6.25) 119(14.9,-5.75) 120(14.9,-5.25) 121(14.9,-4.75) 122(14.9,-4.25) 123(14.9,-3.75) 124(14.9,-3.25) 125(14.9,-2.75) 126(14.9,-2.25) 127(14.9,-1.75) 128(14.9,-1.25) 129(14.9,-0.75) 130(14.9,-0.25) 131(14.9,0.25) 132(14.9,0.75) 133(14.9,1.25) 134(14.9,1.75) 135(14.9,2.25) 136(14.9,2.75) 137(14.9,3.25) 138(14.9,3.75) 139(14.9,4.25) 140(14.9,4.75) 141(14.9,5.25) 142(14.9,5.75) 143(14.9,6.25) 144(14.9,6.75) 145(14.9,7.25) 146(14.9,7.75) 147(14.9,8.25) 148(14.9,8.75) 149(14.9,9.25) 150(14.9,9.75) 151(14.9,10.25) 152(14.9,10.75) 153(14.9,11.25) 154(14.9,11.75) 155(14.9,12.25) 156(14.9,12.75)
  rect 0.3x1.55 smd: 53(-12.75,-14.9) 54(-12.25,-14.9) 55(-11.75,-14.9) 56(-11.25,-14.9) 57(-10.75,-14.9) 58(-10.25,-14.9) 59(-9.75,-14.9) 60(-9.25,-14.9) 61(-8.75,-14.9) 62(-8.25,-14.9) 63(-7.75,-14.9) 64(-7.25,-14.9) 65(-6.75,-14.9) 66(-6.25,-14.9) 67(-5.75,-14.9) 68(-5.25,-14.9) 69(-4.75,-14.9) 70(-4.25,-14.9) 71(-3.75,-14.9) 72(-3.25,-14.9) 73(-2.75,-14.9) 74(-2.25,-14.9) 75(-1.75,-14.9) 76(-1.25,-14.9) 77(-0.75,-14.9) 78(-0.25,-14.9) 79(0.25,-14.9) 80(0.75,-14.9) 81(1.25,-14.9) 82(1.75,-14.9) 83(2.25,-14.9) 84(2.75,-14.9) 85(3.25,-14.9) 86(3.75,-14.9) 87(4.25,-14.9) 88(4.75,-14.9) 89(5.25,-14.9) 90(5.75,-14.9) 91(6.25,-14.9) 92(6.75,-14.9) 93(7.25,-14.9) 94(7.75,-14.9) 95(8.25,-14.9) 96(8.75,-14.9) 97(9.25,-14.9) 98(9.75,-14.9) 99(10.25,-14.9) 100(10.75,-14.9) 101(11.25,-14.9) 102(11.75,-14.9) 103(12.25,-14.9) 104(12.75,-14.9) 157(12.75,14.9) 158(12.25,14.9) 159(11.75,14.9) 160(11.25,14.9) 161(10.75,14.9) 162(10.25,14.9) 163(9.75,14.9) 164(9.25,14.9) 165(8.75,14.9) 166(8.25,14.9) 167(7.75,14.9) 168(7.25,14.9) 169(6.75,14.9) 170(6.25,14.9) 171(5.75,14.9) 172(5.25,14.9) 173(4.75,14.9) 174(4.25,14.9) 175(3.75,14.9) 176(3.25,14.9) 177(2.75,14.9) 178(2.25,14.9) 179(1.75,14.9) 180(1.25,14.9) 181(0.75,14.9) 182(0.25,14.9) 183(-0.25,14.9) 184(-0.75,14.9) 185(-1.25,14.9) 186(-1.75,14.9) 187(-2.25,14.9) 188(-2.75,14.9) 189(-3.25,14.9) 190(-3.75,14.9) 191(-4.25,14.9) 192(-4.75,14.9) 193(-5.25,14.9) 194(-5.75,14.9) 195(-6.25,14.9) 196(-6.75,14.9) 197(-7.25,14.9) 198(-7.75,14.9) 199(-8.25,14.9) 200(-8.75,14.9) 201(-9.25,14.9) 202(-9.75,14.9) 203(-10.25,14.9) 204(-10.75,14.9) 205(-11.25,14.9) 206(-11.75,14.9) 207(-12.25,14.9) 208(-12.75,14.9)
  silkscreen extent -15.03,-13.72 13.72,13.72
PWR2.5 [mm]
  round 4 hole 3: 1(13.7,0) 2(10.6,-5) 3(7.5,0)
  silkscreen extent 0,-4.48 14.3,4.5
RB8/3.5 [mil]
  rect 70x70 hole 27.56: 1(0,60)
  round 70 hole 27.56: 2(0,-60)
  silkscreen extent -160,-160 160,160
SSO-G20/P.65 [mm]
  rect 0.4x2.15 smd: 1(-2.925,-3.275) 2(-2.275,-3.275) 3(-1.625,-3.275) 4(-0.975,-3.275) 5(-0.325,-3.275) 6(0.325,-3.275) 7(0.975,-3.275) 8(1.625,-3.275) 9(2.275,-3.275) 10(2.925,-3.275) 11(2.925,3.275) 12(2.275,3.275) 13(1.625,3.275) 14(0.975,3.275) 15(0.325,3.275) 16(-0.325,3.275) 17(-0.975,3.275) 18(-1.625,3.275) 19(-2.275,3.275) 20(-2.925,3.275)
  silkscreen extent -3.8,-3.4 3.75,1.8
TO-263 [mm]
  rect 1x3.4 smd: 1(0,0) 2(2.54,0) 3(5.08,0)
  rect 10.25x8.9 smd: 4(2.54,10.45)
  silkscreen extent -3.1,-3.12 8.2,15
VO20 [mm]
  rect 0.3x1.65 smd: 1(-2.925,-2.775) 2(-2.275,-2.775) 3(-1.625,-2.775) 4(-0.975,-2.775) 5(-0.325,-2.775) 6(0.325,-2.775) 7(0.975,-2.775) 8(1.625,-2.775) 9(2.275,-2.775) 10(2.925,-2.775) 11(2.925,2.775) 12(2.275,2.775) 13(1.625,2.775) 14(0.975,2.775) 15(0.325,2.775) 16(-0.325,2.775) 17(-0.975,2.775) 18(-1.625,2.775) 19(-2.275,2.775) 20(-2.925,2.775)
  silkscreen extent -3.75,-2.9 3.3,1.55
XO600CP [mm]
  round 1.27 hole 0.7: 1(0,0) 7(15.24,0) 8(15.24,7.62) 14(0,7.62)
  silkscreen extent -2.54,-2.54 17.78,10.16

## Part data
C200 C201 C202 C203 C204 C205 C206 C207 C208 C209 C210 C211 C212 C213 C214 C215 C216 C217 C218 C219 C220 C221 C222 C223 C224 C225 C226 C227 C232 C233 C500 C501 C700 C701 C702 C703 C704: library part CAP, "Capacitor"
C228 C229 C230 C231 C502 C600 C601 C602 C603 C604 C605 C606 C705: library part CAP_POLAR, "Polar Capacitor"
HDR500 HDR600 HDR601 HDR602 HDR603 HDR604 HDR605 HDR606 HDR607: "Header, 2-Pin"
HDR501: "Header, 5-Pin, Dual row"
J600: "Low Voltage Power Supply Sonnector"
J700: library part "D Connector 9", "Receptacle Assembly, 9 Position, Right Angle"
JP400_PortIOA JP400_PortIOB JP400_PortIOC JP400_PortIOD: "Header, 30-Pin, Dual row"
R200 R401_PortIOA R401_PortIOB R401_PortIOC R401_PortIOD R402_PortIOA R402_PortIOB R402_PortIOC R402_PortIOD R403_PortIOA R403_PortIOB R403_PortIOC R403_PortIOD R500 R600 R601 R602 R603 R604 R605 R606 R700: library part Res2, "Resistor"
RA400_PortIOA RA400_PortIOB RA400_PortIOC RA400_PortIOD RA401_PortIOA RA401_PortIOB RA401_PortIOC RA401_PortIOD RA402_PortIOA RA402_PortIOB RA402_PortIOC RA402_PortIOD RA403_PortIOA RA403_PortIOB RA403_PortIOC RA403_PortIOD RA404_PortIOA RA404_PortIOB RA404_PortIOC RA404_PortIOD RA405_PortIOA RA405_PortIOB RA405_PortIOC RA405_PortIOD RA406_PortIOA RA406_PortIOB RA406_PortIOC RA406_PortIOD RA407_PortIOA RA407_PortIOB RA407_PortIOC RA407_PortIOD RA408_PortIOA RA408_PortIOB RA408_PortIOC RA408_PortIOD RA409_PortIOA RA409_PortIOB RA409_PortIOC RA409_PortIOD RA410_PortIOA RA410_PortIOB RA410_PortIOC RA410_PortIOD RA411_PortIOA RA411_PortIOB RA411_PortIOC RA411_PortIOD RA500 RA501 RA502 RA503 RA504 RA505: library part MNR34, "3216x4 Resistor Array"
S600: library part PCB_MOUNT_SWITCH, "SPDT Subminiature Toggle Switch"
SW200: "SPNA SMD Keyboard Switch"
U1: "Spartan-IIE 1.8V FPGA, 208-Pin PQFP, Standard Performance, Commercial Grade"
U200: library part XO_CAN_DIP14_1M, "IC, Oscillator, Canned, CMOS o/p, General Purpose, No Enable/Disable, 32MHz"
U201: "Hex Inverter with 5V-Tolerant Inputs"
U500: "Low-Voltage Quad 2-Input Multiplexer with 5V-Tolerant Inputs (Non-Inverting)"
U501: "XCF00S Series, Platform Flash In-System Programmable Configuration 3.3V PROM, 20-Pin TSOP, 4-Megabit, Commercial Grade"
U600 U601: "5A Low Dropout Possitive Regulators"
U700: "3.0V TO 5.5V, Low-Power, up to 1Mbps, True RS-232 Transceiver Using Four 0.1µF External Capacitor"

## Free pads (board coordinates)
  round 39.37 hole 19.68: 0(-90.05,-1107.42) GND(-1423.77,-1716.41) GND(-1423.77,-1416.41) GND(-1423.77,-1116.41) GND(-1423.77,-816.41) GND(-1355.26,1425.8) GND(-1055.26,1425.8) GND(-755.26,1425.8) GND(-455.26,1425.8) GND(324.74,-1784.91) GND(624.74,-1784.91) GND(924.74,-1784.91) GND(1224.74,-1784.91) GND(1388.24,23.59) GND(1388.24,323.59) GND(1388.24,623.59) GND(1388.24,923.59)
  round 39.37 smd paste-19.68 mask+39.37: FID(-601.88,-569.32) FID(571.35,603.9) FID(2169.93,-2228.77)

## Via types
v1: diameter 40, hole 19.68, Top Layer to Bottom Layer, 173 vias

## Nets (pads, with @x,y where several pads share a name; then routed paths per layer and width w, separated by ;. In a path a pad name is that pad's centre, name@x,y a point inside that pad or via, vN(x,y) a via of type N, cw(c..) or ccw(c..) an arc to the next point about the centre after c; other vN are vias at no path point)
5V: C232.1 C600.1 C602.1 C605.1 JP400_PortIOA.27 JP400_PortIOA.29 JP400_PortIOA.31 JP400_PortIOA.33 JP400_PortIOB.27 JP400_PortIOB.29 JP400_PortIOB.31 JP400_PortIOB.33 JP400_PortIOC.27 JP400_PortIOC.29 JP400_PortIOC.31 JP400_PortIOC.33 JP400_PortIOD.27 JP400_PortIOD.29 JP400_PortIOD.31 JP400_PortIOD.33 S600.3 U200.14 U600.3 U601.3 | length 21272.8
  Top Layer w12: -257.4,-2255.73 C232.1@-257.4,-2185 -257.4,-2255.73 ; -257.4,-2255.73 -214.03,-2299.1 ; -257.4,-2255.73 -214.03,-2299.1 ; -214.03,-2396.14 -214.03,-2299.1 ; -214.03,-2396.14 JP400_PortIOB.31@-165.26,-2444.91 -214.03,-2396.14 ; -214.03,-2396.14 -214.03,-2299.1
  Top Layer w24: v1@1644.74,2795.12 v1(1644.74,2791.19) C600.1@1644.74,2171.35 ; C232.1@-280,-2162.4 C232.1@-257.4,-2185 C232.1@-280,-2162.4 ; C232.1@-280,-2162.4 U200.14@-280,-2020 C232.1@-280,-2162.4 ; C600.1@1644.74,2171.35 1822.77,2171.35 ; C600.1@1644.74,2171.35 1822.77,2171.35 ; 1822.77,2171.35 1864.74,2129.38 ; 1822.77,2171.35 1864.74,2129.38 ; 1864.74,2129.38 U601.3@1864.74,2032.29 1864.74,2129.38 ; 2344.74,2141.13 C602.1@2436.84,2233.24 ; 2344.74,2141.13 U600.3@2344.74,2032.29 2344.74,2141.13 ; 2344.74,2141.13 v1(2362.2,2159.45) C602.1@2436.84,2233.24 ; C602.1@2436.84,2233.24 C602.1@2444.74,2233.24 C602.1@2436.84,2233.24
  Bottom Layer w24: -2301.18,-526.41 JP400_PortIOA.27@-2083.77,-526.41 ; -2301.18,-426.41 JP400_PortIOA.29@-2083.77,-426.41 ; -2301.18,-326.41 JP400_PortIOA.31@-2083.77,-326.41 ; -2301.18,-226.41 JP400_PortIOA.33@-2083.77,-226.41 ; -265.26,-2687.99 JP400_PortIOB.33@-265.26,-2444.91 ; JP400_PortIOD.27@-165.66,2087.37 -165.66,2325.32 ; -165.26,-2687.99 JP400_PortIOB.31@-165.26,-2444.91 ; JP400_PortIOD.29@-65.66,2087.37 -65.66,2325.32 ; -65.26,-2687.99 JP400_PortIOB.29@-65.26,-2444.91 ; JP400_PortIOD.31@34.34,2087.37 34.34,2325.32 ; 34.74,-2687.99 JP400_PortIOB.27@34.74,-2444.91 ; JP400_PortIOD.33@134.34,2087.37 134.34,2325.32 ; JP400_PortIOC.33@2053.24,-526.41 2362.2,-526.41 ; JP400_PortIOC.31@2053.24,-426.41 2362.2,-426.41 ; JP400_PortIOC.29@2053.24,-326.41 2362.2,-326.41 ; JP400_PortIOC.27@2053.24,-226.41 2362.2,-226.41
  Bottom Layer w50: 2306.37,2570.66 2408.16,2672.29 S600.3@2484.74,2672.29
  Bottom Layer w100: -2301.18,-226.38 -2301.18,-326.41 -2301.18,-426.41 -2301.18,-526.41 -2301.18,-1977.36 -1589.57,-2687.99 -265.26,-2687.99 -165.26,-2687.99 -65.26,-2687.99 34.74,-2687.99 1583.66,-2687.99 2362.2,-1910.43 2362.2,-526.41 2362.2,-426.41 2362.2,-326.41 2362.2,-226.38 v1(2362.2,2159.45) 2362.2,2514.76 2306.37,2570.66 C605.1@2184.74,2692.29 C605.1@2185.03,2692 ; -165.66,2325.32 -65.66,2325.32 34.34,2325.32 134.34,2325.32 369.05,2325.32 834.72,2791 834.91,2791.19 v1(1644.74,2791.19) 1993.08,2791.19 1993.27,2791 2091.98,2692.29 C605.1@2184.74,2692.29
  other v1: 2362.2,2159.45
CCLK: U1.155 U501.3 | length 3815.4
  Top Layer w6: v1(-897.91,-627.23) -916.61,-608.53 -916.61,-491.44 -867.11,-441.94 -672,-441.94 -648.95,-464.99 U1.155@-601.88,-464.99
  Top Layer w10: U501.3@-2311.29,1821.54 -2311.29,1866.86 -2295.19,1882.96 -2004.91,1882.96 -1922.48,1800.53 v1(-1922.48,1559.45)
  Bottom Layer w8: v1(-1922.48,1559.45) -1463.71,1100.68 -1463.71,-61.43 v1(-897.91,-627.23)
CFG_DIN: U1.153 U501.1 | length 3712.4
  Top Layer w6: v1(-978.6,-651.83) -978.6,-508.25 -888.29,-417.94 -662.06,-417.94 -654.38,-425.62 U1.153@-601.88,-425.62
  Top Layer w10: U501.1@-2260.11,1821.54 -2216.41,1865.24 -2114.14,1865.24 -2074.78,1825.88 -2074.78,1659.58 v1(-1847.48,1432.28)
  Bottom Layer w8: v1(-1847.48,1432.28) -1847.48,1382.11 -1813.7,1348.32 -1525.7,1060.33 -1525.7,-104.72 v1(-978.6,-651.83)
CFG_INIT: RA500.2 U1.107 U501.8 | length 2699.3
  Top Layer w6: -938.26,477.8 -924.97,464.52 -667.03,464.52 -651.66,479.89 U1.107@-601.88,479.89
  Top Layer w10: U501.8@-2439.24,1821.54 -2439.24,1714.09 -2411.3,1686.16 -2235.17,1686.16 -2208.6,1712.72 -2208.6,1762.91 -2194.22,1777.29 -2134.42,1777.29 -2114.14,1757 -2114.14,1628.1 -1962.6,1476.56 -1962.6,1390.96 -1847.47,1275.83 -1736.28,1275.83 -1712.59,1252.14 -938.26,477.8
CLK_BRD: U1.182 U201.2 | length 498.2
  Top Layer w6: U1.182@-25.11,-569.32 -25.11,-606.52 -64.42,-645.83 -64.42,-889.26 6,-959.68 U201.2@6,-1022.08
CTS: J700.7 U700.9 | length 754.9
  Top Layer w10: U700.9@2280.17,-2228.77 2280.17,-2321.44 2300.09,-2341.36 2429.98,-2341.36 2531.33,-2442.71 2531.33,-2666.08 2507.71,-2689.69 2474.17,-2689.69 J700.7@2424.26,-2739.6
DONE: R500.2 U1.104 U501.10 | length 2663.4
  Top Layer w6: -667.45,650.77 -524.73,650.77 -517.23,643.28 U1.104@-517.23,603.91
  Top Layer w8: -869.38,832.04 -688.1,650.77 -667.47,650.77
  Top Layer w10: R500.2@-2597.86,1732.29 -2497.78,1732.29 ; U501.10@-2490.42,1821.54 -2490.42,1768.81 -2497.78,1761.45 -2497.78,1732.29 ; v1(-2023.61,1463.77) -2188.92,1629.08 -2226.31,1666.48 -2431.97,1666.48 -2497.78,1732.29 ; v1(-1903.56,1423.43) -1812.05,1331.92 -1424.35,1331.92 -924.48,832.04 -869.38,832.04
  Bottom Layer w8: v1(-2023.61,1463.77) -1943.9,1463.77 v1(-1903.56,1423.43)